# Altium PCB BatteryIot - 焊接图.PcbDoc
Units mil, origin at the board's own origin, x right, y up, seen from the top; angles counter-clockwise.
Board outline 4488.19 x 3307.09 mil, 2 copper layers (Top Layer, Bottom Layer); 162 components, 97 nets, 548 pads, 0 vias.
Unrouted connection lines stored in the file: 385.
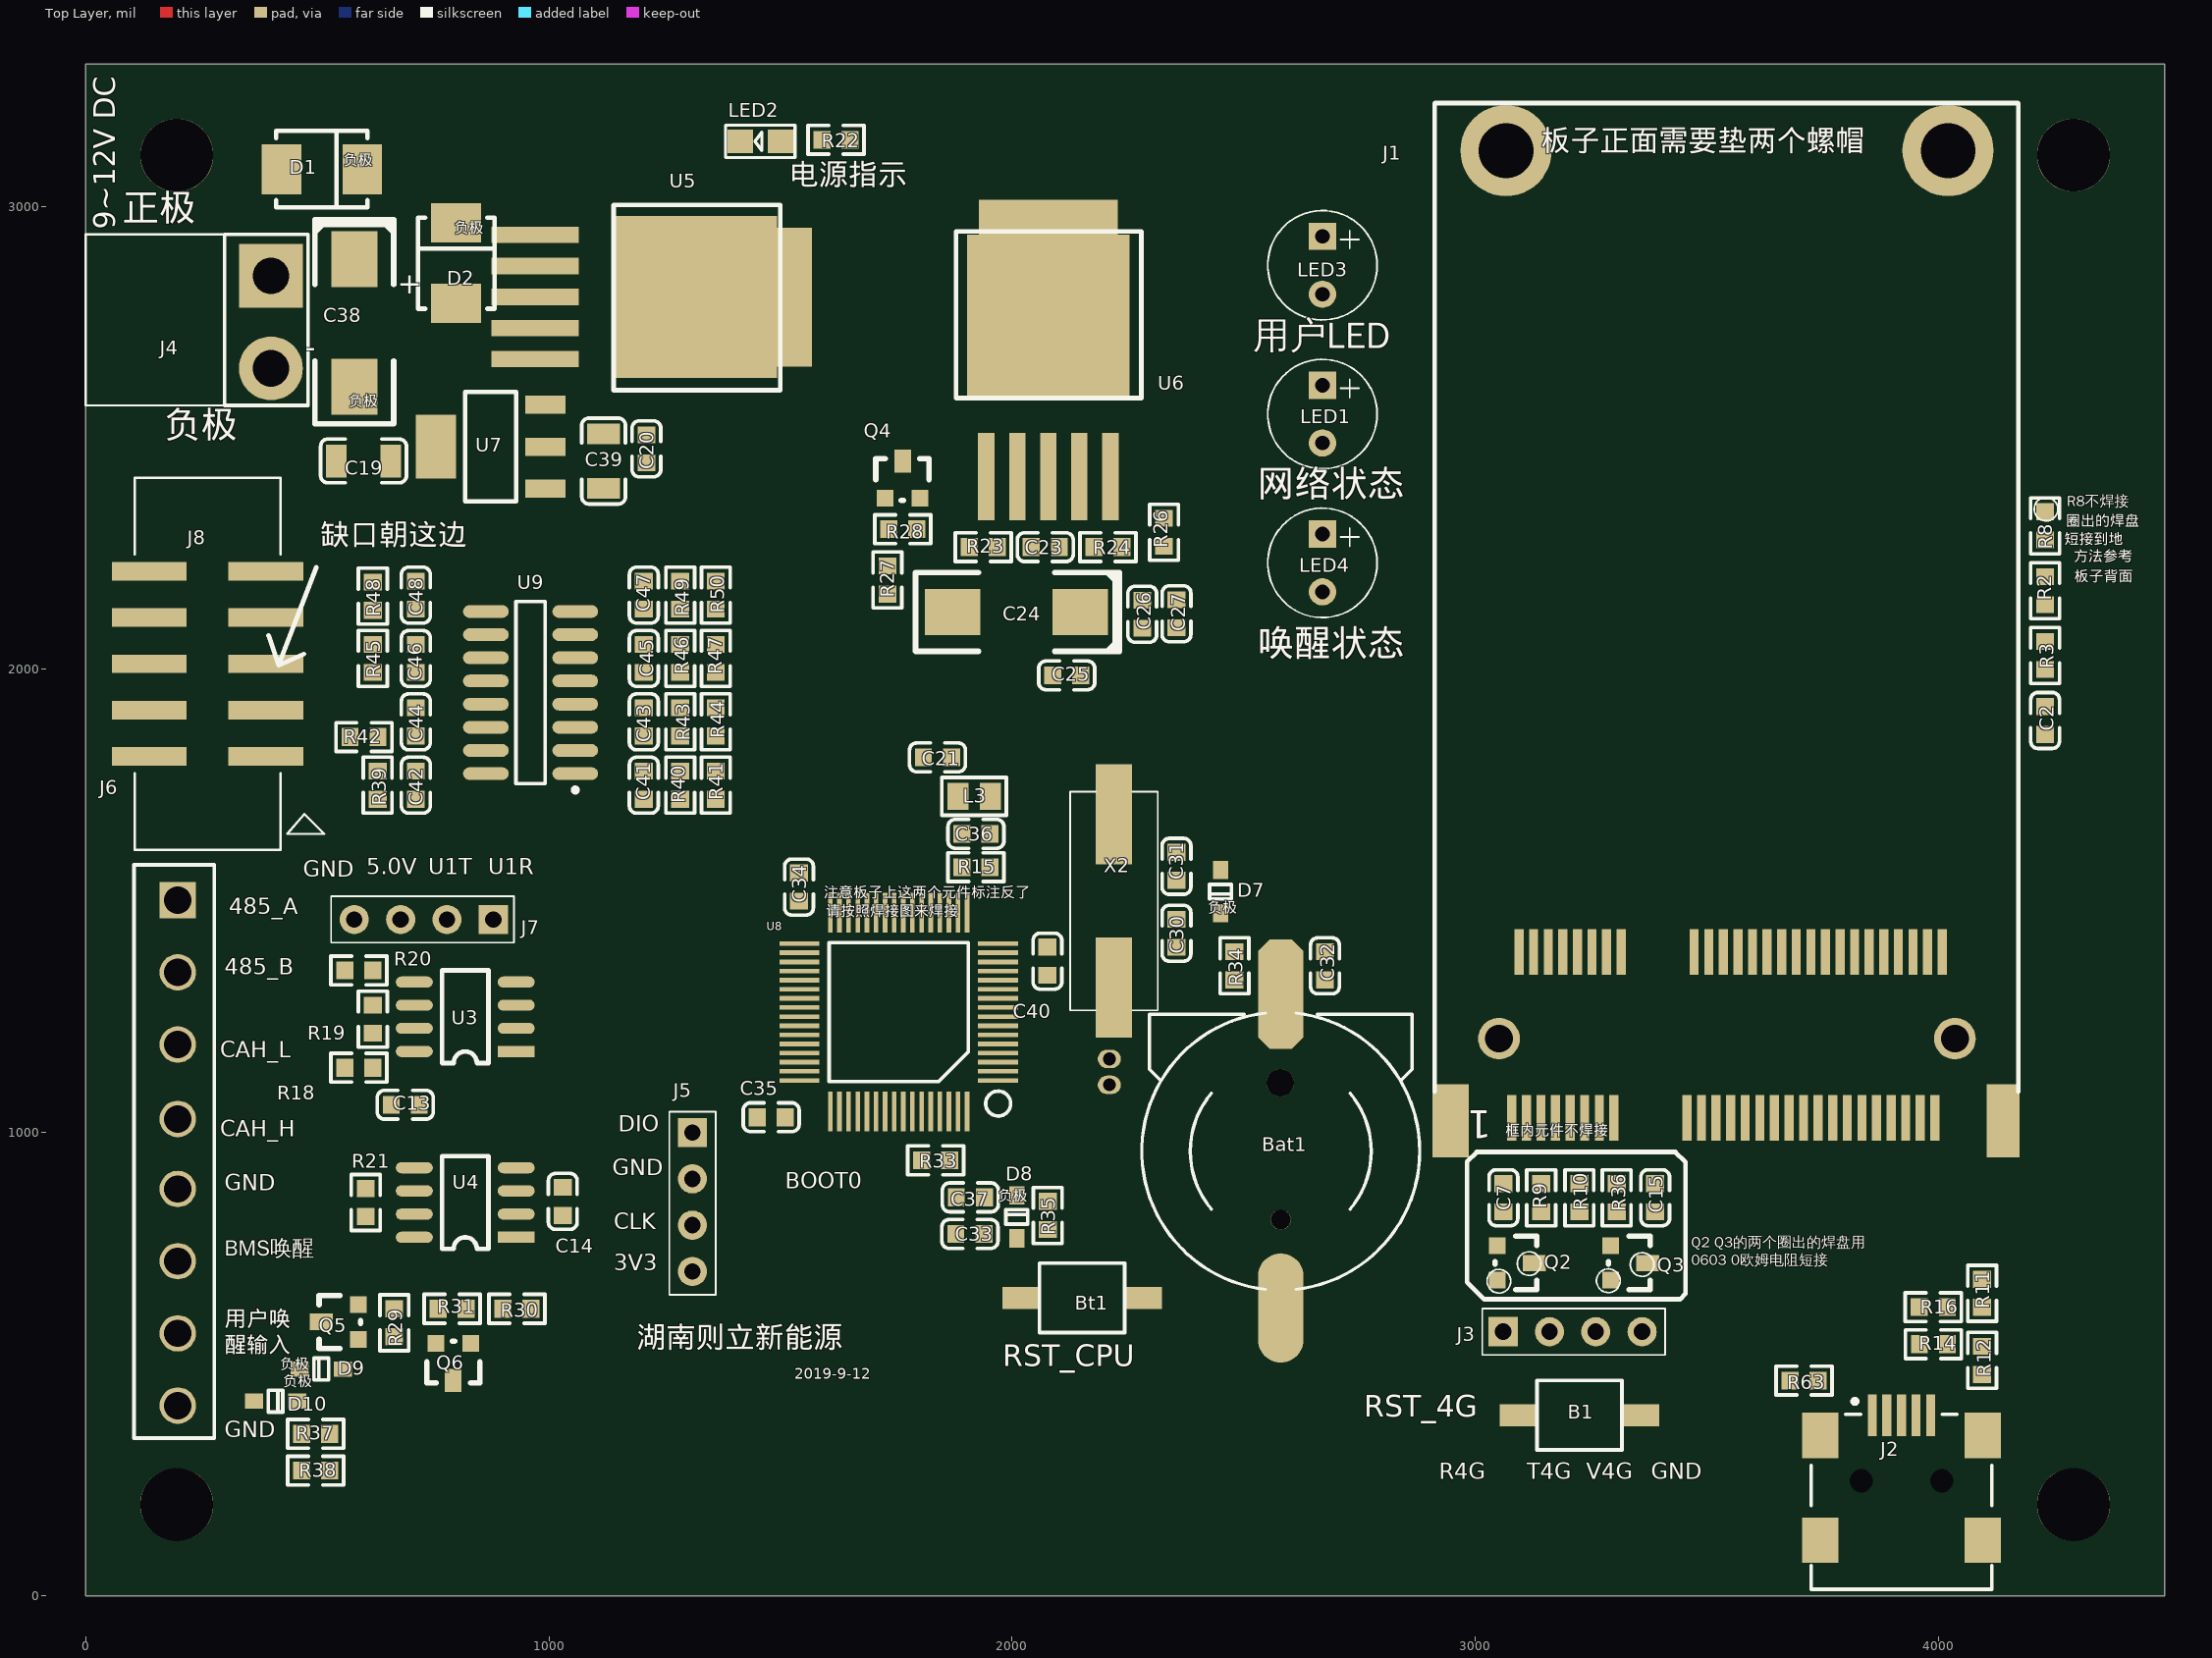
[diagram p0: Top Layer view]
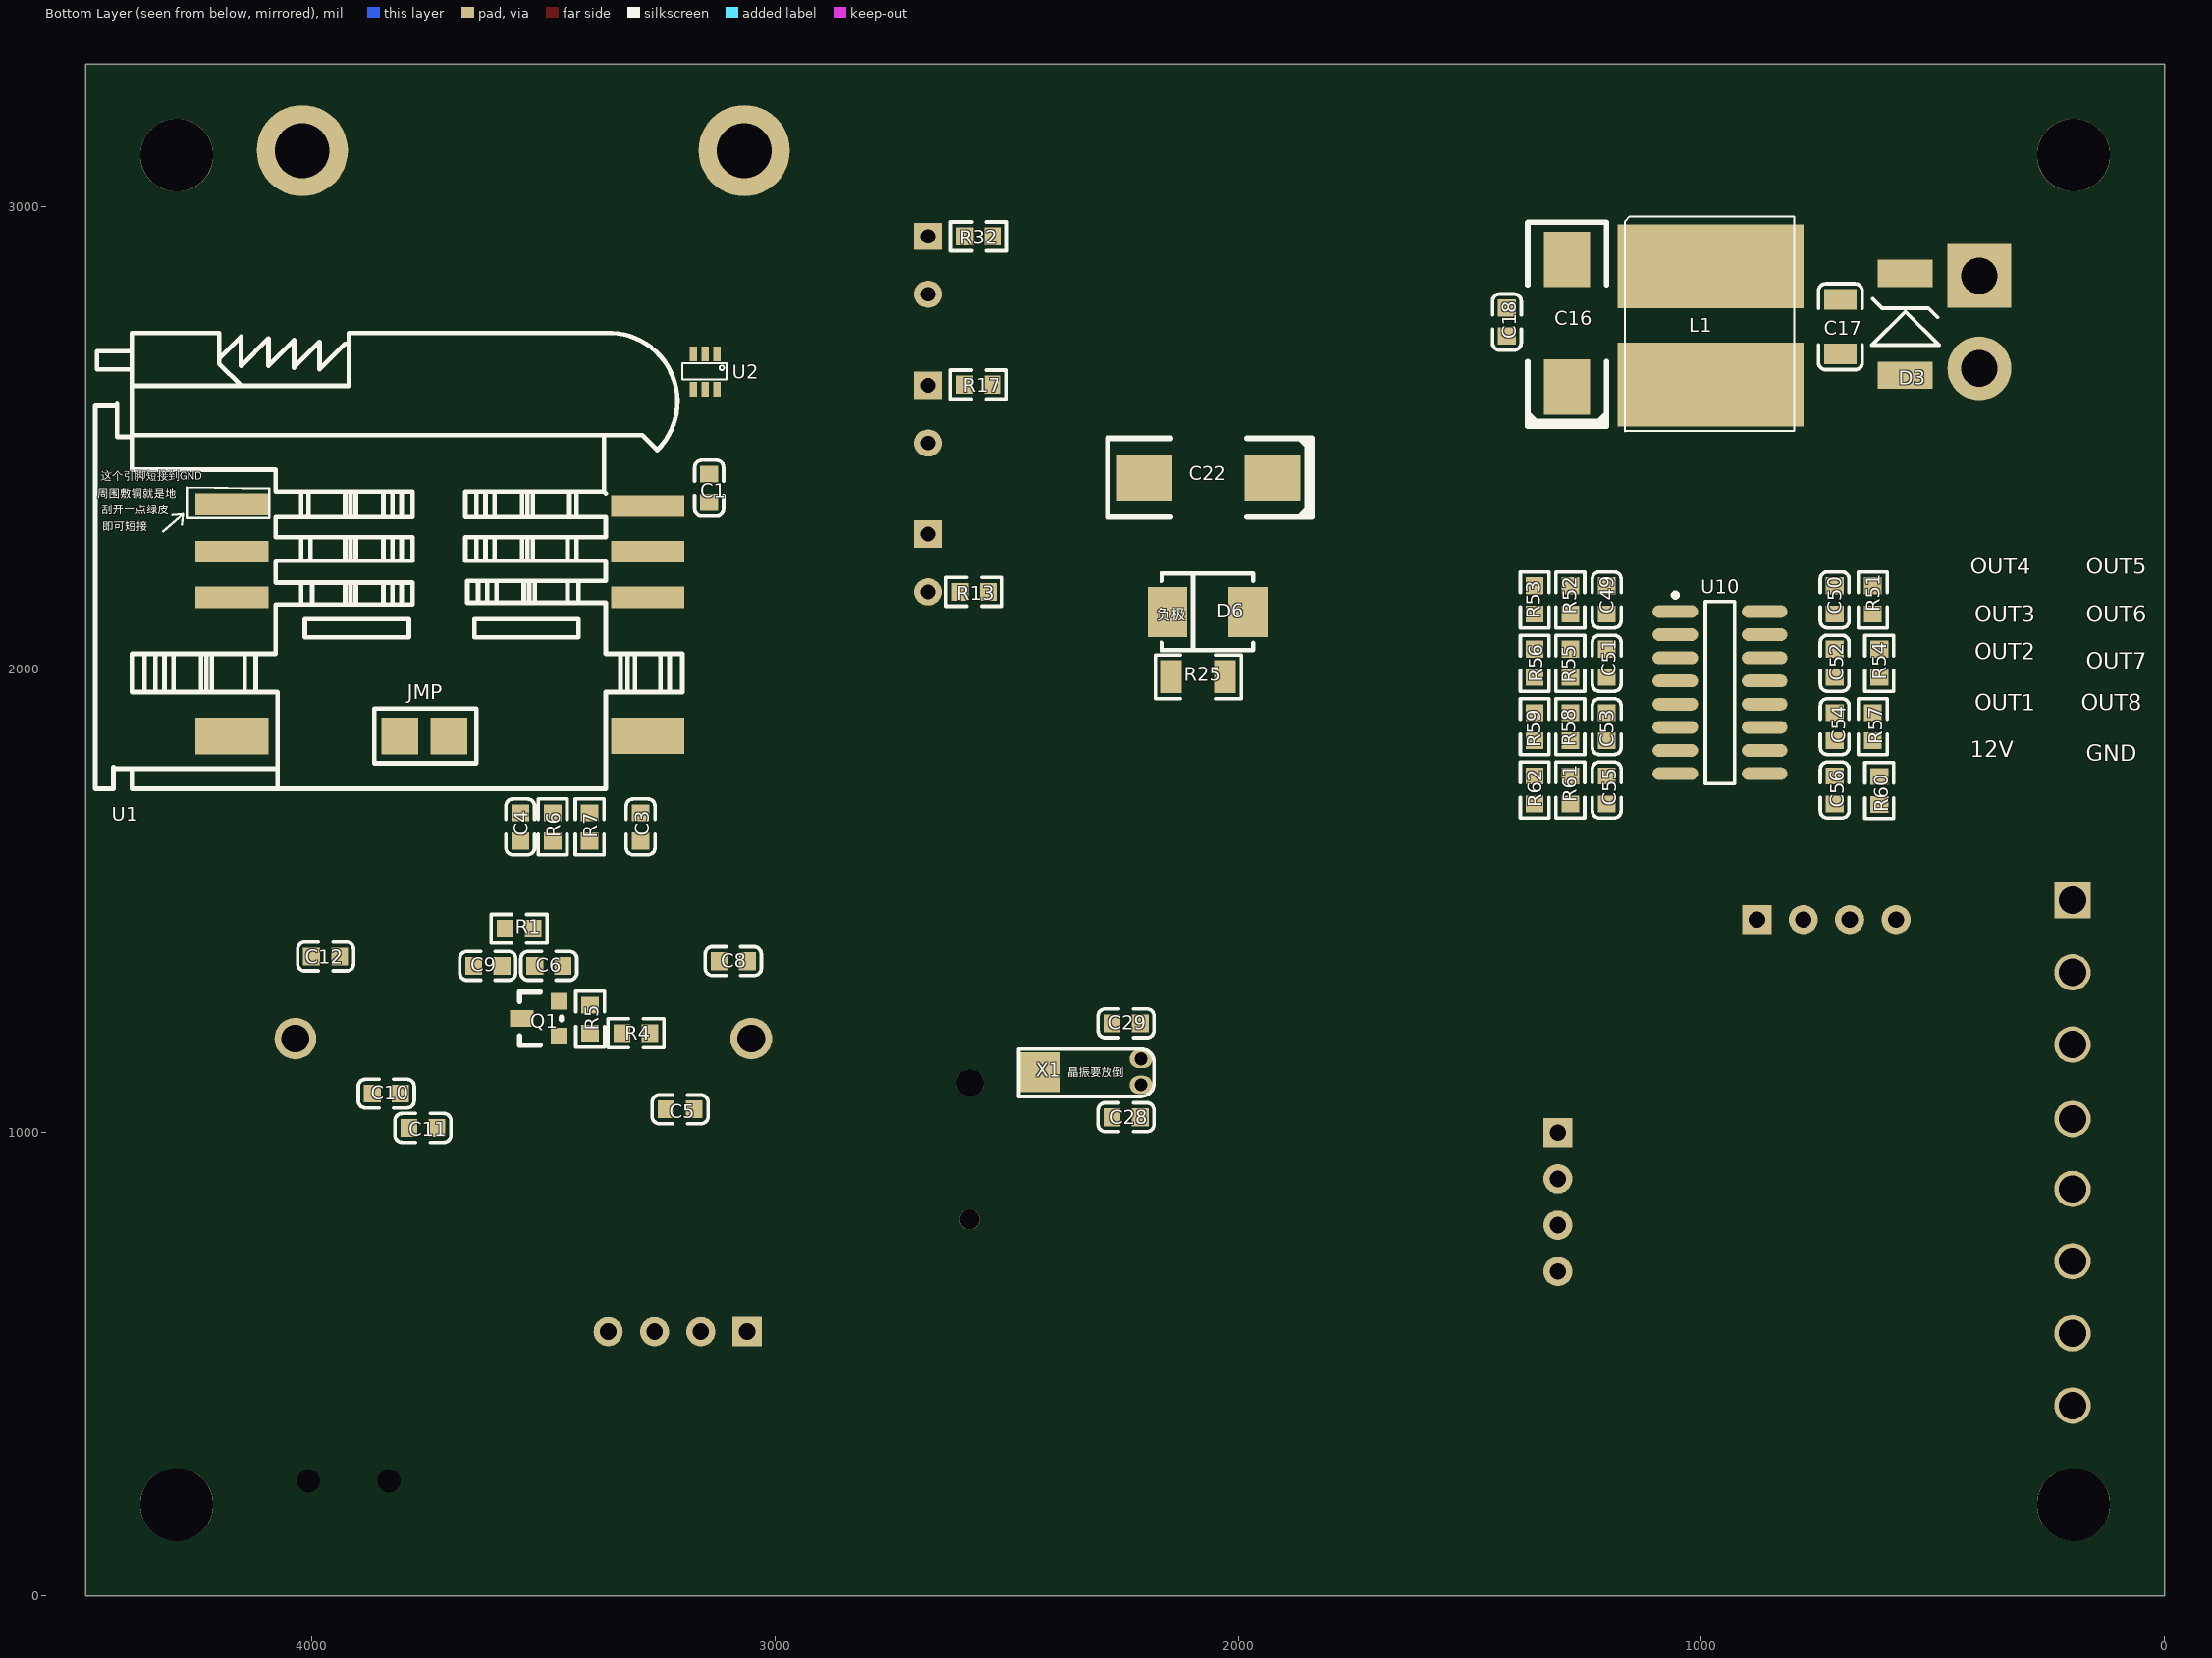
[diagram p1: Bottom Layer view, seen from below]

## Layer stack, top to bottom
Top Solder: solder mask 0.4, Solder Resist, Dk 3.5
Top Layer: signal copper 1.4
Dielectric 1: dielectric 12.6, FR-4, Dk 4.8
Bottom Layer: signal copper 1.4
Bottom Solder: solder mask 0.4, Solder Resist, Dk 3.5

## Board outline
0,0 0,3307.09 4488.19,3307.09 4488.19,0

## Design rules (kind name [scope] priority, off if disabled: settings)
Clearance Clearance_2 [InNamedPolygon('GND') vs InNetClass('PW_IN')] p1: gap=20
Clearance Clearance_1 [InNet('12V') or InNet('5.0V') vs InPoly] p2: gap=20
Clearance [All] p3: gap=10
DiffPairsRouting [All] p1: maxlimit=10 minlimit=10 mostfreqgap=10 toplayer_minwidth=15 toplayer_maxwidth=25 toplayer_prefwidth=20 bottomlayer_minwidth=15 bottomlayer_maxwidth=25 bottomlayer_prefwidth=20 maxuncoupledlength=500
HoleSize [All] p1: absolutevalues=TRUE maxlimit=1000 minlimit=1 maxpercent=80.000 minpercent=20.000
PolygonConnect PolygonConnect_1 [IsVia vs IsPolygon] p1: connectstyle=Direct reliefconductorwidth=10 reliefentries=4 polygonreliefangle="90 Angle" airgapwidth=10
PolygonConnect [All] p2: connectstyle=Relief reliefconductorwidth=20 reliefentries=4 polygonreliefangle="90 Angle" airgapwidth=10
RoutingVias [All] p1: holewidth=28 width=50 viastyle="Through Hole" minholewidth=28 minwidth=50 maxholewidth=28 maxwidth=50
SolderMaskExpansion [All] p1: expansion=4
Width [All] p1: maxlimit=800 minlimit=10 preferedwidth=20
27 further rules are at their usual default settings.

## Classes and differential pairs
component class TopLevelMCU: Bat1 Bt1 C28 C29 C30 C31 C32 C33 C34 C35 C36 C37 D7 D8 J5 J6 J7 R33 R34 R35 U8 X1 X2
component class COMM: C13 C14 R18 R19 R20 R21 U3 U4
component class EC20: B1 C1 C2 C3 C4 C6 C8 C9 C10 C11 C12 J1 J2 J3 LED1 LED4 Q1 R1 R2 R3 R4 R5 R6 R7 R8 R11 R12 R13 R14 R16 R17 R63 U1 U2
component class GPIO: C41 C42 C43 C44 C45 C46 C47 C49 C50 C51 C52 C53 C54 C55 C56 D9 D10 J8 LED3 Q5 Q6 R29 R30 R31 R32 R37 R38 R39 R40 R41 R42 R43 R44 R45 R46 R47 R48 R49 R50 R51 R52 R53 R54 R55 R56 R57 R58 R59 R60 R61 R62 U9 U10
component class PWR: C16 C17 C18 C19 C20 C21 C22 C23 C24 C25 C26 C27 C38 C39 C40 D1 D2 D3 D6 J4 L1 L3 LED2 Q4 R22 R23 R24 R25 R26 R27 R28 U5 U6 U7
differential pair USB: +USB_P -USB_N
differential pair CAN: +CAN_P -CAN_N
differential pair RS: +RS_P -RS_N

## Components (designator, comment, footprint, x,y, rotation, side; value= is the part's Value field where it differs from the comment)
B1 "Reset" "3*6*2.5贴片 微动开关" 3224.72,389.72 r180 top
Bat1 "3v Battery" BATM 2580,959.68 r180 top
Bt1 "Reset" "3*6*2.5贴片 微动开关" 2151,643 r180 top
C1 "104" 0603_C 3142.2,2391.1 r90 bottom
C2 "33pF" 0603_C 4230,1889.68 r270 top
C3 "33pF" 0603_C 3290,1660 r90 bottom
C4 "33pF" 0603_C 3550,1660 r90 bottom
C5 "100nF" 0603_C 3204.72,1050 r180 bottom
C6 "104" 0603_C 3488.19,1360 r180 bottom
C7 "1nF" 0603_C 3060.79,859.25 r270 top
C8 "104" 0603_C 3090,1370 r0 bottom
C9 "104" 0603_C 3620,1360 r0 bottom
C10 "104" 0603_C 3839.1,1084.09 r0 bottom
C11 "104" 0603_C 3760,1010 r180 bottom
C12 "104" 0603_C 3970,1380 r180 bottom
C13 "104" 0603_C 690,1060 r180 top
C14 "104" 0603_C 1030,851.31 r270 top
C15 "1nF" 0603_C 3388.27,859.25 r90 top
C16 "220uF/10V" SMD-CT-7343 1290,2610 r90 bottom
C17 "104" 1206_C 700,2740 r270 bottom
C18 "104" 0603_C 1420,2750 r270 bottom
C19 "10uF" 1206_C 600,2450 r180 top
C20 "104" 0603_C 1210.56,2476.1 r270 top
C21 "104" 0603_C 1839,1810 r180 top
C22 "470uF/10V" SMD-CT-7343 1926.26,2414.04 r0 bottom
C23 "104" 0603_C 2071.68,2264 r0 top
C24 "470uF/10V" SMD-CT-7343 2147.26,2124.04 r180 top
C25 "104" 0603_C 2118,1987 r180 top
C26 "33pF" 0603_C 2281,2119 r270 top
C27 "10pF" 0603_C 2355,2120 r270 top
C28 "22p" 0603_C 2242.37,1033 r0 bottom
C29 "22p" 0603_C 2242.37,1236 r0 bottom
C30 "22p" 0603_C 2355,1430.32 r90 top
C31 "22p" 0603_C 2355,1574.68 r270 top
C32 "104" 0603_C 2675.47,1360 r90 top
C33 "104" 0603_C 1909,781 r180 top
C34 "104" 0603_C 1540,1530 r90 top
C35 "104" 0603_C 1480,1033 r180 top
C36 "104" 0603_C 1922,1644.91 r0 top
C37 "104" 0603_C 1910,860 r180 top
C38 "470u/25V" SMD-CT-7343 580,2885.86 r270 top
C39 "10uF" 1206_C 1118.24,2449.76 r90 top
C40 "104" 0603_C 2076.32,1370 r270 top
C41 "100nF 10% 50V" 0603_C 1205.01,1750 r270 top
C42 "100nF 10% 50V" 0603_C 712.91,1750 r270 top
C43 "100nF 10% 50V" 0603_C 1205.01,1886.77 r270 top
C44 "100nF 10% 50V" 0603_C 712.91,1886.77 r270 top
C45 "100nF 10% 50V" 0603_C 1205.01,2023.54 r270 top
C46 "100nF 10% 50V" 0603_C 712.91,2023.54 r270 top
C47 "100nF 10% 50V" 0603_C 1205.01,2160.31 r270 top
C48 "100nF 10% 50V" 0603_C 712.91,2160.31 r270 top
C49 "100nF 10% 50V" 0603_C 1204.47,2150 r90 bottom
C50 "100nF 10% 50V" 0603_C 712.36,2150 r90 bottom
C51 "100nF 10% 50V" 0603_C 1204.47,2013.23 r90 bottom
C52 "100nF 10% 50V" 0603_C 712.36,2013.23 r90 bottom
C53 "100nF 10% 50V" 0603_C 1204.47,1876.46 r90 bottom
C54 "100nF 10% 50V" 0603_C 712.36,1876.46 r90 bottom
C55 "100nF 10% 50V" 0603_C 1204.47,1739.69 r90 bottom
C56 "100nF 10% 50V" 0603_C 712.36,1739.69 r90 bottom
D1 "SS34" SMB(DO-214AA)_S1 510,3080 r180 top
D2 "SS34" SMB(DO-214AA)_S1 800,2877.01 r270 top
D3 "M7" SMBJ 560,2740 r90 bottom
D6 "SMBJ5.0A" SMB(DO-214AA)_S1 2066.26,2124.04 r180 bottom
D7 "1N4148" SOD-323 2450,1520 r90 top
D8 "1N4148" SOD-323 2010,818 r270 top
D9 "1N4148" SOD-323 508.86,489.45 r0 top
D10 "1N4148" SOD-323 410,420 r180 top
J1 "MINI-PCIE-CON" EC20_MINIPCI 3543.31,2072.91 r0 top locked
J2 "Debug 4G" USB_MINI_NEW 4011.1,244.56 r0 top
J3 "CON4" CON4(2.54) 3060,570 r90 top
J4 "CON2" CON5.08-2P 400,2850 r0 top
J5 "CON4" CON4(2.54) 1310,1000 r0 top
J6 "CON8" CON8-3.96mm 199,956.14 r0 top
J7 "CON4" CON4(2.54) 880,1460 r270 top
J8 "CON10" XH2.54-SMD-5*2P 263.25,2012 r90 top locked
L1 "33uH" "CD105-33uH 2A" 980,2870 r180 bottom
L3 "10nH" 0805_L 1918,1726 r0 top
LED1 "NET" LED 2670,2551.25 r270 top
LED2 "5VPWR" SMDLED 1500,3140 r180 top
LED3 "5VPWR" LED 2670,2872.5 r270 top
LED4 "WAKE" LED 2670,2230 r270 top
Q1 "S8050" SOT-23 3498.9,1244.52 r90 bottom
Q2 "S8050" SOT-23 3080.19,720 r270 top
Q3 "S8050" SOT-23 3324.68,720 r270 top
Q4 "2N5551" SOT-23 1761.96,2402.26 r0 top
Q5 "AO3401A P道沟 X13A15 SOT-23" SOT-23 556.42,589.45 r90 top
Q6 "2N5551" SOT-23 795.36,512.01 r180 top
R1 "1K" 0603_R 3552.36,1440 r0 bottom
R2 "10K" 0603_R 4230,2170 r270 top
R3 "22R" 0603_R 4230,2030 r270 top
R4 "4.7K" 0603_R 3300,1214.52 r0 bottom
R5 "47K" 0603_R 3398.9,1244.83 r90 bottom
R6 "22R" 0603_R 3480,1660 r270 bottom
R7 "22R" 0603_R 3400,1660 r270 bottom
R8 "0R" 0603_R 4230,2310 r90 top
R9 "4.7k" 0603_R 3142.2,859.25 r270 top
R10 "10k" 0603_R 3224.72,859.25 r90 top
R11 "15K" 0603_R 4093.94,652.99 r270 top
R12 "15K" 0603_R 4093.94,507.99 r90 top
R13 "1k" 0603_R 2570,2167.5 r0 bottom
R14 "22R" 0603_R 3988.94,542.99 r0 top
R15 "10k" 0603_R 1922,1573 r0 top
R16 "22R" 0603_R 3988.62,622.99 r0 top
R17 "1k" 0603_R 2560.31,2615 r0 bottom
R18 "360R" 0603_R 590,1140 r180 top
R19 "120R" 0603_R 620,1244.83 r270 top
R20 "360R" 0603_R 590,1350 r0 top
R21 "120R" 0603_R 604.57,848.94 r270 top
R22 "4.7K" 0603_R 1620,3143.52 r0 top
R23 "51K" 0603_R 1937.68,2264 r0 top
R24 "82K" 0603_R 2207,2264 r180 top
R25 "470R" 1206_R 2086.26,1984.04 r0 bottom
R26 "47K" 0603_R 2328,2296 r270 top
R27 "4.7K" 0603_R 1731,2193 r270 top
R28 "47K" 0603_R 1763.89,2302.57 r180 top
R29 "5.1K" 0603_R 666.42,589.45 r270 top
R30 "4.7K" 0603_R 931.11,619.45 r0 top
R31 "47K" 0603_R 791.11,619.45 r0 top
R32 "1k" 0603_R 2560,2935 r0 bottom
R33 "10K" 0603_R 1834.96,940 r0 top
R34 "1K" 0603_R 2480,1360 r270 top
R35 "10K" 0603_R 2077,821 r270 top
R36 "4.7k" 0603_R 3305.28,859.25 r90 top
R37 "8k" 0603_R 496.42,349.45 r0 top
R38 "3.3k" 0603_R 496.42,270 r180 top
R39 "3.3KΩ  ±5%" 0603_R 630.54,1750 r90 top
R40 "2KΩ ±5%" 0603_R 1283.61,1750 r270 top
R41 "700Ω ±10%" 0603_R 1360.54,1750 r90 top
R42 "3.3KΩ  ±5%" 0603_R 601,1854 r180 top
R43 "2KΩ ±5%" 0603_R 1283.61,1886.77 r270 top
R44 "700Ω ±10%" 0603_R 1360.54,1886.77 r90 top
R45 "3.3KΩ  ±5%" 0603_R 620,2023.54 r90 top
R46 "2KΩ ±5%" 0603_R 1283.61,2023.54 r270 top
R47 "700Ω ±10%" 0603_R 1360.54,2023.54 r90 top
R48 "3.3KΩ  ±5%" 0603_R 620,2158 r270 top
R49 "2KΩ ±5%" 0603_R 1283.61,2160.31 r270 top
R50 "700Ω ±10%" 0603_R 1360.54,2160.31 r90 top
R51 "3.3KΩ  ±5%" 0603_R 630,2150 r270 bottom
R52 "2KΩ ±5%" 0603_R 1283.07,2150 r90 bottom
R53 "700Ω ±10%" 0603_R 1360,2150 r270 bottom
R54 "3.3KΩ  ±5%" 0603_R 616,2013.23 r90 bottom
R55 "2KΩ ±5%" 0603_R 1283.07,2013.23 r90 bottom
R56 "700Ω ±10%" 0603_R 1360,2013.23 r270 bottom
R57 "3.3KΩ  ±5%" 0603_R 630,1876.46 r270 bottom
R58 "2KΩ ±5%" 0603_R 1283.07,1876.46 r90 bottom
R59 "700Ω ±10%" 0603_R 1360,1876.46 r270 bottom
R60 "3.3KΩ  ±5%" 0603_R 616,1738.68 r90 bottom
R61 "2KΩ ±5%" 0603_R 1283.07,1739.69 r90 bottom
R62 "700Ω ±10%" 0603_R 1360,1739.69 r270 bottom
R63 "0R" 0603_R 3709.69,464.45 r180 top
U1 "SIM" SIM_BIG_POPUP 3723.38,2106.46 r90 bottom locked
U2 "SMF05C" SOT363 3124.88,2681.34 r0 bottom
U3 "SP3485" SOP8 819.57,1250 r180 top
U4 "SN65HVD230DR" SO-8 929.57,773.94 r180 top
U5 "LM2596" TO-263-5-NEW 1164.9,2843.42 r180 top
U6 "MIC29302" TO-263-5-NEW 2038.84,2610.93 r270 top
U7 "AMS1117-3.3" SOT-223 874.38,2480.67 r0 top
U8 "STM32F103RET6" LQFP64 1970,1112.52 r180 top locked
U9 "TLP291-4" SOP16_M 960.54,1950 r180 top
U10 "TLP291-4" SOP16_M 960,1950 r180 bottom
X1 "32.768kHz" XTAL32 2210,1103 r0 bottom
X2 "8MHz" Crystal_SMD 2220,1500 r90 top

## Footprints (in the part's own frame and the unit in brackets; to place one, negate y for a bottom-side part, rotate by r counter-clockwise, add the part's x,y. Pads: shape width x height; smd on the part's side, far side on the other; paste and mask are expansions set on the pad)
"3*6*2.5贴片 微动开关" [mm]
  rect 2x1.2 smd mask+0.05: 1(-3.375,0) 2(3.375,0)
  silkscreen extent -2.33,-1.9 2.32,1.9
0603_C [mm]
  rect 0.93x0.98 smd: 1(-0.77,0) 2(0.77,0)
  silkscreen extent -1.53,-0.79 1.54,0.79, body extent -0.8,-0.4 0.8,0.4, height 0.3
0603_R [mm]
  rect 0.93x0.98 smd: 1(-0.77,0) 2(0.77,0)
  silkscreen extent -1.53,-0.79 1.54,0.79, body extent -0.85,-0.4 0.85,0.4, height 0.56
0805_L [mm]
  rect 1.16x1.47 smd: 1(-0.89,0) 2(0.89,0)
  silkscreen extent -1.77,-1.04 1.77,1.03, body extent -1,-0.64 1,0.64, height 0.6
1206_C [mm]
  rect 1.13x1.8 smd: 1(-1.49,0) 2(1.49,0)
  silkscreen extent -2.36,-1.2 2.35,1.2, body extent -1.6,-0.81 1.6,0.79, height 1
1206_R [mm]
  rect 1.13x1.8 smd: 1(-1.49,0) 2(1.49,0)
  silkscreen extent -2.36,-1.2 2.35,1.2, body extent -1.7,-0.86 1.65,0.87, height 0.85
BATM [mm]
  round 1.1 hole 1.1 unplated: 0(0,3.748)
  round 1.5 hole 1.5 unplated: 0(0.025,-3.752)
  oct 2.5x6 smd: 1(0,-8.602)
  oval 2.5x6 smd: 2(0,8.598)
  silkscreen extent -7.62,-7.58 7.62,7.57
"CD105-33uH 2A" [mm]
  rect 10.2x4.6 smd: 1(0,0) 2(0,-6.477)
CON4(2.54) [mm]
  rect 1.6x1.6 hole 0.9 mask+0.05: 1(0,0)
  round 1.6 hole 0.9 mask+0.05: 2(0,-2.54)
  round 1.6 hole 0.9: 3(0,-5.08) 4(0,-7.62)
  silkscreen extent -1.27,-8.89 1.27,1.14
CON5.08-2P [mm]
  rect 3.5x3.5 hole 2: 1(0,0)
  round 3.5 hole 2: 2(0,-5.08)
  silkscreen extent -10.16,-7.11 2.03,2.26
CON8-3.96mm [mm]
  rect 2x2 hole 1.5: 1(0,13.86)
  round 2 hole 1.5: 2(0,9.9) 3(0,5.94) 4(0,1.86) 5(0,-1.98) 6(0,-5.94) 7(0,-9.9) 8(0,-13.86)
  silkscreen extent -2.4,-15.64 2,15.79
Crystal_SMD [mm]
  rect 5.5x2 smd: 1(-4.75,0) 2(4.75,0)
  silkscreen extent -6,-2.4 6,2.4
EC20_MINIPCI [mm]
  round 2.286 hole 1.524: 0(-12.5,-22.1) 0(12.5,-22.1)
  rect 0.5x2.5 smd: 1(-11.8,-26.45) 2(-11.4,-17.35) 3(-11,-26.45) 4(-10.6,-17.35) 5(-10.2,-26.45) 6(-9.8,-17.35) 7(-9.4,-26.45) 8(-9,-17.35) 9(-8.6,-26.45) 10(-8.2,-17.35) 11(-7.8,-26.45) 12(-7.4,-17.35) 13(-7,-26.45) 14(-6.6,-17.35) 15(-6.2,-26.45) 16(-5.8,-17.35) 17(-2.2,-26.45) 18(-1.8,-17.35) 19(-1.4,-26.45) 20(-1,-17.35) 21(-0.6,-26.45) 22(-0.2,-17.35) 23(0.2,-26.45) 24(0.6,-17.35) 25(1,-26.45) 26(1.4,-17.35) 27(1.8,-26.45) 28(2.2,-17.35) 29(2.6,-26.45) 30(3,-17.35) 31(3.4,-26.45) 32(3.8,-17.35) 33(4.2,-26.45) 34(4.6,-17.35) 35(5,-26.45) 36(5.4,-17.35) 37(5.8,-26.45) 38(6.2,-17.35) 39(6.6,-26.45) 40(7,-17.35) 41(7.4,-26.45) 42(7.8,-17.35) 43(8.2,-26.45) 44(8.6,-17.35) 45(9,-26.45) 46(9.4,-17.35) 47(9.8,-26.45) 48(10.2,-17.35) 49(10.6,-26.45) 50(11,-17.35) 51(11.4,-26.45) 52(11.8,-17.35)
  round 5 hole 3: 53(12.12,26.6) 54(-12.116,26.6)
  rect 1.8x4 smd: 55(15.15,-26.6)
  rect 2x4 smd: 56(-15.15,-26.6)
  silkscreen extent -16.04,-25.01 15.97,29.21
LED [mm]
  rect 1.5x1.5 hole 0.8: 1(-1.587,0)
  round 1.5 hole 0.8: 2(1.587,0)
  silkscreen extent -3,-3 3,3
LQFP64 [mm]
  rect 2.2x0.254 smd: 1(0,0) 2(0,-0.5) 3(0,-1) 4(0,-1.5) 5(0,-2) 6(0,-2.5) 7(0,-3) 8(0,-3.5) 9(0,-4) 10(0,-4.5) 11(0,-5) 12(0,-5.5) 13(0,-6) 14(0,-6.5) 15(0,-7) 16(0,-7.5) 33(10.9,-7.5) 34(10.9,-7) 35(10.9,-6.5) 36(10.9,-6) 37(10.9,-5.5) 38(10.9,-5) 39(10.9,-4.5) 40(10.9,-4) 41(10.9,-3.5) 42(10.9,-3) 43(10.9,-2.5) 44(10.9,-2) 45(10.9,-1.5) 46(10.9,-1) 47(10.9,-0.5) 48(10.9,0)
  rect 0.254x2.2 smd: 17(1.7,-9.2) 18(2.2,-9.2) 19(2.7,-9.2) 20(3.2,-9.2) 21(3.7,-9.2) 22(4.2,-9.2) 23(4.7,-9.2) 24(5.2,-9.2) 25(5.7,-9.2) 26(6.2,-9.2) 27(6.7,-9.2) 28(7.2,-9.2) 29(7.7,-9.2) 30(8.2,-9.2) 31(8.7,-9.2) 32(9.2,-9.2) 49(9.2,1.7) 50(8.7,1.7) 51(8.2,1.7) 52(7.7,1.7) 53(7.2,1.7) 54(6.7,1.7) 55(6.2,1.7) 56(5.7,1.7) 57(5.2,1.7) 58(4.7,1.7) 59(4.2,1.7) 60(3.7,1.7) 61(3.2,1.7) 62(2.7,1.7) 63(2.2,1.7) 64(1.7,1.7)
  silkscreen extent -0.68,-7.56 9.26,1.95
SIM_BIG_POPUP [mm]
  rect 1.2x4 smd: 1(6.25,-11.4) 2(3.75,-11.4) 3(1.25,-11.4) 4(6.35,11.4) 5(3.75,11.4) 6(1.25,11.4)
  rect 2.032x2.032 smd: 7(-6.35,-0.5) 8(-6.35,2.2)
  rect 2x4 smd: 7(-6.35,-11.4)
  rect 2.032x4 smd: 8(-6.35,11.4)
  silkscreen extent -9.25,-13.3 15.75,18.9
SMB(DO-214AA)_S1 [mil]
  rect 85x107.99 smd: 1(87.01,0) 2(-87.01,0)
  silkscreen extent -98,-83 98,83
SMBJ [mm]
  rect 1.5x3 smd: 1(-2.667,0) 2(2.921,0)
  silkscreen extent -1.02,-1.85 1.52,1.83
SMD-CT-7343 [mil]
  rect 120x100 smd: 1(0,0) 2(275.59,0)
  silkscreen extent -85,-85 356,85
SMDLED [mm]
  rect 1.4x1.27 smd: 1(0.001,-0.002) 2(2.211,-0.002)
  silkscreen extent -0.8,-0.89 3.01,0.89
SO-8 [mil]
  rect 80x24 smd: 1(0,0)
  oval 80x24 smd: 2(0,-50) 3(0,-100) 4(0,-150) 5(220,-150) 6(220,-100) 7(220,-50) 8(220,0)
  silkscreen extent 60,-175 160,25
SOD-323 [mm]
  rect 1x0.83 smd: 1(1.18,0) 2(-1.18,0)
  silkscreen extent -0.4,-0.6 0.4,0.6, body extent -1.35,-0.62 1.35,0.63, height 1.1
SOP8 [mil]
  rect 80x24 smd: 1(-110,75)
  oval 80x24 smd: 2(-110,25) 3(-110,-25) 4(-110,-75) 5(110,-75) 6(110,-25) 7(110,25) 8(110,75)
  silkscreen extent -50,-100 50,100
SOP16_M [mm]
  oval 2.5x0.7 smd: 1(-2.45,4.445) 2(-2.45,3.175) 3(-2.45,1.905) 4(-2.45,0.635) 5(-2.45,-0.635) 6(-2.45,-1.905) 7(-2.45,-3.175) 8(-2.45,-4.445) 9(2.45,-4.445) 10(2.45,-3.175) 11(2.45,-1.905) 12(2.45,-0.635) 13(2.45,0.635) 14(2.45,1.905) 15(2.45,3.175) 16(2.45,4.445)
  silkscreen extent -2.57,-5 0.8,5.47, body extent -2,-5 2,5, height 1.75
SOT363 [mm]
  rect 0.4x0.8 smd: 1(0,0) 2(0.65,0) 3(1.3,0) 4(1.3,1.94) 5(0.65,1.94) 6(0,1.94)
  silkscreen extent -0.51,0.51 1.91,1.4
SOT-23 [mil]
  rect 36x36 smd: 1(-36.06,-32.44) 2(38.94,-32.44)
  rect 36x50 smd: 3(1.94,47.56)
  silkscreen extent -56,-37 59,53
SOT-223 [mm]
  rect 2.2x1 smd: 1(3,-2.3) 2(3,0) 3(3,2.3)
  rect 2.2x3.5 smd: 2(-3,0)
  silkscreen extent -1.4,-3 1.4,3, body extent -3.49,-3.24 3.49,3.24, height 1.64
TO-263-5-NEW [mm]
  rect 4.8x0.9 smd: 1(4.95,-2.402) 2(4.95,-0.701) 3(4.95,1.001) 4(4.95,2.703) 5(4.95,4.405)
  rect 2.5x7.62 smd: 3(-9,1)
  rect 8.89x8.89 smd: 3(-3.889,1)
  silkscreen extent -8.51,-4.05 0.64,6.11
USB_MINI_NEW [mm]
  rect 0.5x2.3 smd: 1(-3.914,3.687) 2(-3.114,3.687) 3(-2.314,3.687) 4(-1.514,3.687) 5(-0.714,3.687)
  rect 2x2.5 smd: 6(2.136,2.587) 7(2.136,-3.167) 8(-6.764,2.587) 9(-6.764,-3.167)
  round 0.6 hole 1.27 unplated: MH1(-0.114,0.087) MH2(-4.514,0.087)
  silkscreen extent -7.26,-5.86 2.64,4.57
XH2.54-SMD-5*2P [mm]
  rect 1.02x4.1 smd: 1(-5.08,-3.194) 2(-2.54,-3.194) 3(0,-3.194) 4(2.54,-3.194) 5(5.08,-3.194) 6(5.08,3.194) 7(2.54,3.194) 8(0,3.194) 9(-2.54,3.194) 10(-5.08,3.194)
  silkscreen extent -10.2,-4 10.2,4
XTAL32 [mil]
  oval 50x40 hole 28: 1(0,0) 2(0,-56)
  rect 92.13x86 smd: ""(220,-27)
  silkscreen extent -28,-77 264,25

## Part data
B1 Bt1: library part "PUSH BUTTON"
Bat1: library part MS621FE
C1 C2 C3 C4 C5 C6 C7 C8 C9 C10 C11 C12 C13 C14 C15 C17 C18 C19 C20 C21 C23 C25 C26 C27 C32 C33 C34 C35 C36 C37 C39 C40: library part C
C16 C22 C24 C38: library part CAP
C28 C29 C30 C31: library part CAP, "Capacitor"
C41 C42 C43 C44 C45 C46 C47 C48 C49 C50 C51 C52 C53 C54 C55 C56: library part "0603 1nF (102) 10% 50V", "贴片电容"
D3 D6: library part SMBJ, "TVS"
D7 D8: library part D
D9 D10: library part SS34
J2: library part USB5
L1 L3: library part L
LED1 LED2 LED3 LED4: library part LED2, "Typical RED, GREEN, YELLOW, AMBER GaAs LED"
Q1 Q2 Q3 Q4 Q6: library part NPN
Q5: "MOS(场效应管)"
R1 R4 R5 R9 R10 R15 R33 R34 R35 R36: library part R
R2 R3 R6 R7 R8 R11 R12 R13 R14 R16 R17 R18 R19 R20 R21 R22 R23 R24 R25 R26 R27 R28 R29 R30 R31 R32 R37 R38 R63: library part RES
R39 R42 R45 R48 R51 R54 R57 R60: library part "0603 3.3KΩ (3301) 1%", "贴片电阻"
R40 R43 R46 R49 R52 R55 R58 R61: library part "0603 2KΩ (2001) 1%", "贴片电阻"
R41 R44 R47 R50 R53 R56 R59 R62: library part "0603 5.6KΩ (5601) 1%", "贴片电阻"
U1: library part SIM-抽屉式插卡
U3: library part SP3485E
U4: library part TJA1050
U6: library part MIC29302WU
U7: library part AMS1117
U8: library part STM32F103RDT6
U9 U10: library part PS2801, "东芝四通道光耦 SOP16"
X1 X2: library part Crystal2

## Free pads (board coordinates)
  round 157.48 hole 157.48: 0(196.85,196.85) 0(196.85,3110.24) 0(4291.34,196.85) 0(4291.34,3110.24)

## Nets (pads, with @x,y where several pads share a name; then routed paths per layer and width w, separated by ;. In a path a pad name is that pad's centre, name@x,y a point inside that pad or via, vN(x,y) a via of type N, cw(c..) or ccw(c..) an arc to the next point about the centre after c; other vN are vias at no path point)
3.3V: C13.1 C14.1 C19.1 C21.1 C34.1 C35.1 C36.1 C37.1 C41.2 C43.2 C45.2 C47.2 C49.2 C51.2 C53.2 C55.2 D7.1 D8.2 J5.4 L3.1 R15.1 R20.1 R32.1 R35.1 R40.2 R43.2 R46.2 R49.2 R52.2 R55.2 R58.2 R61.2 U3.8 U4.3 U7.2 U8.19 U8.32 U8.48 U8.64 U9.1 U9.3 U9.5 U9.7 U10.1 U10.3 U10.5 U10.7
3.3VA: C40.1 L3.2 U8.13
5.0V: C16.1 C18.2 C20.1 C22.1 C23.1 C39.2 J7.3 L1.2 R22.2 R23.2 R63.2 U5.4 U6.2 U7.3
12V: C17.1 C38.1 D1.2 D3.2 Q5.2 R29.1 U5.1
12V_OUT: J8.1 R39.2 R42.2 R45.2 R48.2 R51.2 R54.2 R57.2 R60.2
BOOT0: R33.1 U8.60
CAN_N: J6.3 R21.1 U4.6
CAN_P: J6.4 R21.2 U4.7
CAN_RX: U4.4 U8.44
CAN_TX: U4.1 U8.45
CPU_WK: R30.2 U8.50
EC20_RST: B1.1 C6.1 J1.22 Q1.3 R1.1
GND: B1.2 Bat1.2 Bt1.1 C1.2 C2.2 C3.2 C4.2 C5.2 C6.2 C8.2 C9.2 C10.2 C11.2 C12.2 C13.2 C14.2 C16.2 C17.2 C18.1 C19.2 C20.2 C21.2 C22.2 C23.2 C24.2 C25.2 C26.2 C27.2 C28.2 C29.2 C30.2 C31.2 C32.2 C33.2 C34.2 C35.2 C36.2 C37.2 C38.2 C39.1 C40.2 D2.1 D3.1 D6.1 J1.4 J1.9 J1.15 J1.18 J1.21 J1.26 J1.27 J1.29 J1.34 J1.35 J1.37 J1.40 J1.43 J1.50 J1.53 J1.54 J1.55 J1.56 J2.5 J3.4 J4.2 J5.2 J6.5 J6.8 J7.4 LED2.2 Q1.2 Q4.2 Q6.2 R5.2 R11.1 R12.1 R13.1 R18.2 R25.1 R26.1 R28.1 R31.1 R33.2 R38.2 U1.8 U2.2 U3.5 U4.2 U4.8 U5.3 U5.5 U6.3 U7.1 U8.12 U8.18 U8.31 U8.47 U8.63
GND_OUT: C42.1 C44.1 C46.1 C48.1 C50.1 C52.1 C54.1 C56.1 J8.10 U9.9 U9.11 U9.13 U9.15 U10.9 U10.11 U10.13 U10.15
LED_WWAN: J1.42 LED1.2
NetC7_2: C7.2 Q2.1 R9.2
NetC15_1: C15.1 Q3.1 R36.1
NetC41_1: C41.1 R40.1 R41.2 U9.2
NetC43_1: C43.1 R43.1 R44.2 U9.4
NetC45_1: C45.1 R46.1 R47.2 U9.6
NetC47_1: C47.1 R49.1 R50.2 U9.8
NetC49_1: C49.1 R52.1 R53.2 U10.2
NetC51_1: C51.1 R55.1 R56.2 U10.4
NetC53_1: C53.1 R58.1 R59.2 U10.6
NetC55_1: C55.1 R61.1 R62.2 U10.8
NetD1_1: D1.1 J4.1
NetD2_2: D2.2 L1.1 U5.2
NetD7_2: D7.2 R34.1
NetD9_1: D9.1 Q5.3
NetD9_2: D9.2 D10.2 J6.6 R37.1
NetD10_1: D10.1 J6.7
NetJ1_32: J1.32 LED4.1
NetJ2_2: J2.2 R16.1
NetJ2_3: J2.3 R14.1
NetLED1_1: LED1.1 R17.2
NetLED2_1: LED2.1 R22.1
NetLED3_1: LED3.1 R32.2
NetLED4_2: LED4.2 R13.2
NetQ1_1: Q1.1 R4.2 R5.1
NetQ4_1: Q4.1 R27.1 R28.2
NetQ4_3: Q4.3 R23.1 U6.1
NetQ5_1: Q5.1 Q6.3 R29.2
NetQ6_1: Q6.1 R30.1 R31.2
NetR2_2: R2.2 R3.1 U1.6 U2.3
NetR6_1: R6.1 U1.2 U2.5
NetR7_1: R7.1 U1.3 U2.4
NetR8_1: R8.1 U1.5
NetR8_2: R8.2 U1.4
NetR24_1: R24.1 R26.2 U6.5
NRST: Bt1.2 C33.1 D8.1 R35.2 U8.7
O1: C42.2 J8.2 R39.1 U9.16
O2: C44.2 J8.3 R42.1 U9.14
O3: C46.2 J8.4 R45.1 U9.12
O4: C48.2 J8.5 R48.1 U9.10
O5: C50.2 J8.6 R51.1 U10.16
O6: C52.2 J8.7 R54.1 U10.14
O7: C54.2 J8.8 R57.1 U10.12
O8: C56.2 J8.9 R60.1 U10.10
OT1: R41.1 U8.23
OT2: R44.1 U8.22
OT3: R47.1 U8.21
OT4: R50.1 U8.20
OT5: R53.1 U8.24
OT6: R56.1 U8.25
OT7: R59.1 U8.26
OT8: R62.1 U8.28
PWR_4G: R27.2 U8.9
RE_485: U3.2 U3.3 U8.2
RESET_4G: R4.1 U8.27
RS_N: J6.2 R18.1 R19.2 U3.7
RS_P: J6.1 R19.1 R20.2 U3.6
RXD_4G: J1.23 J3.1 Q2.3 R10.1
SIM_CLK: C3.1 J1.12 R7.2
SIM_DATA: C2.1 J1.10 R3.2
SIM_RST: C4.1 J1.14 R6.2
SIM_VDD: C1.1 J1.8 R2.1 U1.1 U2.6
SWCLK: J5.3 U8.49
SWDIO: J5.1 U8.46
TXD_4G: J1.31 J3.2 Q3.2
U1_RX: J7.1 U8.43
U1_TX: J7.2 U8.42
U2_RX: Q3.3 R15.2 U8.17
U2_TX: Q2.2 U8.16
U3_RX: U3.1 U8.30
U3_TX: U3.4 U8.29
U_LED: LED3.2 U8.15
USB_N: J1.36 R11.2 R16.2
USB_P: J1.38 R12.2 R14.2
V4G: C8.1 C9.1 C10.1 C11.1 C12.1 C24.1 C25.1 C26.1 C27.1 D6.2 J1.2 J1.24 J1.39 J1.41 J1.52 J3.3 R1.2 R17.1 R24.2 R25.2 U6.4
VBAT: Bat1.1 C32.1 R34.2 U8.1
VCC: J2.1 R63.1
VEXT: C5.1 C7.1 C15.2 J1.11 R9.1 R10.2 R36.2
WK_IND: R37.2 R38.1 U8.51
XH1: C30.1 U8.5 X2.1
XH2: C31.1 U8.6 X2.2
XL1: C28.1 U8.3 X1.1
XL2: C29.1 U8.4 X1.2
pads on no net: Bat1.0 J1.0 J1.1 J1.3 J1.5 J1.6 J1.7 J1.13 J1.16 J1.17 J1.19 J1.20 J1.25 J1.28 J1.30 J1.33 J1.44 J1.45 J1.46 J1.47 J1.48 J1.49 J1.51 J2.4 J2.6 J2.7 J2.8 J2.9 J2.MH1 J2.MH2 U1.7 U2.1 U4.5 U8.8 U8.10 U8.11 U8.14 U8.33 U8.34 U8.35 U8.36 U8.37 U8.38 U8.39 U8.40 U8.41 U8.52 U8.53 U8.54 U8.55 U8.56 U8.57 U8.58 U8.59 U8.61 U8.62 X1.

## Silkscreen, mask and mechanical layers (free items; w line width, h text height)
Top Overlay:
  circle w4: c4232,2346 r25.51
  circle w4: c3051,679 r25.51
  circle w4: c3116,717 r25.51
  circle w4: c3360,715 r25.51
  circle w4: c3287.24,680 r25.51
  lines w5: 435,1644.91 515,1644.91 472.32,1687.6 435,1644.91
  lines w10: 471,2033 417,2009 ; 498.44,2220.75 417,2009 ; 3010,958 3432,958 3454,936 3454,652 3442,640 3019,640 2997,662 2982,677 2982,937 3003,958 3015,958 ; 417,2009 395,2073 417,2009
  text "板子正面需要垫两个螺帽" at 3142,3103 h80
  text "负极" at 556,3080 h40
  text "电源指示" at 1520,3030 h80
  text "正极" at 80,2950 h100
  text "9~12V DC" at 80,2950 h80 r90
  text "负极" at 796,2934 h40
  text "+" at 672.8,2795.28 h80
  text "用户LED" at 2520,2674 h100
  text "-" at 473.98,2657.48 h80
  text "负极" at 568,2559.85 h40
  text "负极" at 170,2481.5 h100
  text "网络状态" at 2530,2354 h100
  text "R8不焊接" at 4277,2344 h40
  text "圈出的焊盘" at 4275,2301 h40
  text "短接到地" at 4272,2262 h40
  text "缺口朝这边" at 507,2253 h80
  text "方法参考" at 4292,2225 h40
  text "板子背面" at 4293,2182 h40
  text "唤醒状态" at 2530,2010 h100
  text "5.0V" at 605.75,1545.75 h60
  text "U1T" at 740,1545.75 h60
  text "U1R" at 869.57,1545.75 h60
  text "GND" at 470,1540 h60
  text "注意板子上这两个元件标注反了" at 1594,1499 h40
  text "负极" at 2423,1466 h40
  text "485_A" at 310,1460 h60
  text "请按照焊接图来焊接" at 1598,1459 h40
  text "485_B" at 300,1330 h60
  text "CAH_L" at 290,1150 h60
  text "DIO" at 1150,990 h60
  text "框内元件不焊接" at 3065,985 h40
  text "CAH_H" at 290,980 h60
  text "GND" at 1137,896 h60
  text "BOOT0" at 1510.32,867.06 h60
  text "GND" at 300,863.66 h60
  text "负极" at 1970.43,844.65 h40
  text "CLK" at 1140,780 h60
  text "Q2 Q3的两个圈出的焊盘用" at 3467,744 h40
  text "BMS唤醒" at 300,722.28 h60
  text "0603 0欧姆电阻短接" at 3466,705 h40
  text "3V3" at 1140,690 h60
  text "用户唤" at 300,570 h60
  text "湖南则立新能源" at 1190,520 h80
  text "醒输入" at 300,513.07 h60
  text "负极" at 420,481 h40
  text "RST_CPU" at 1980,480 h80
  text "2019-9-12" at 1530,459.45 h40
  text "负极" at 425.75,443.62 h40
  text "RST_4G" at 2760,370 h80
  text "GND" at 300,330 h60
  text "R4G" at 2922,240 h60
  text "T4G" at 3111.1,240 h60
  text "V4G" at 3240,240 h60
  text "GND" at 3380,240 h60
Bottom Overlay:
  lines w3.94: 800,2515 1164,2515 1165,2514 1165,2968 1155,2978 800,2978 800,2515
  lines w5: 4280,2313 4278,2335 ; 4321,2298 4278,2335 ; 4278,2335 4301,2332.83 4278,2335 ; 4092,2327 4092,2390 4270,2393 4270,2327 4092,2327
  text "这个引脚短接到GND" at 4455,2403 h30
  text "周围敷铜就是地" at 4463,2365 h30
  text "刮开一点绿皮" at 4454,2330 h30
  text "即可短接" at 4452,2294 h30
  text "OUT5" at 170,2194.69 h60
  text "OUT4" at 420,2194.69 h60
  text "负极" at 2177,2099 h40
  text "OUT6" at 170,2090 h60
  text "OUT3" at 410,2090 h60
  text "OUT2" at 410,2010 h60
  text "OUT7" at 170,1990 h60
  text "OUT8" at 180,1900 h60
  text "OUT1" at 410,1900 h60
  text "12V" at 420,1799.12 h60
  text "GND" at 170,1790 h60
  text "晶振要放倒" at 2369,1115 h30
Mechanical 1:
  the board outline again, w3.94

## Text inside footprints (layer, text, board x,y; h text height)
J1: Top Overlay "1" at 3035.44,1048.05 h60 r180
U1: Bottom Overlay "JMP" at 3794.25,1935.2 h31.5